# Altium PCB Lab11.PcbDoc
Units mil, origin at the board's own origin, x right, y up, seen from the top; angles counter-clockwise.
Board outline 4232.28 x 3051.18 mil, 2 copper layers (Top Layer, Top, Bottom Layer, Bottom); 13 components, 9 nets, 27 pads, 0 vias.
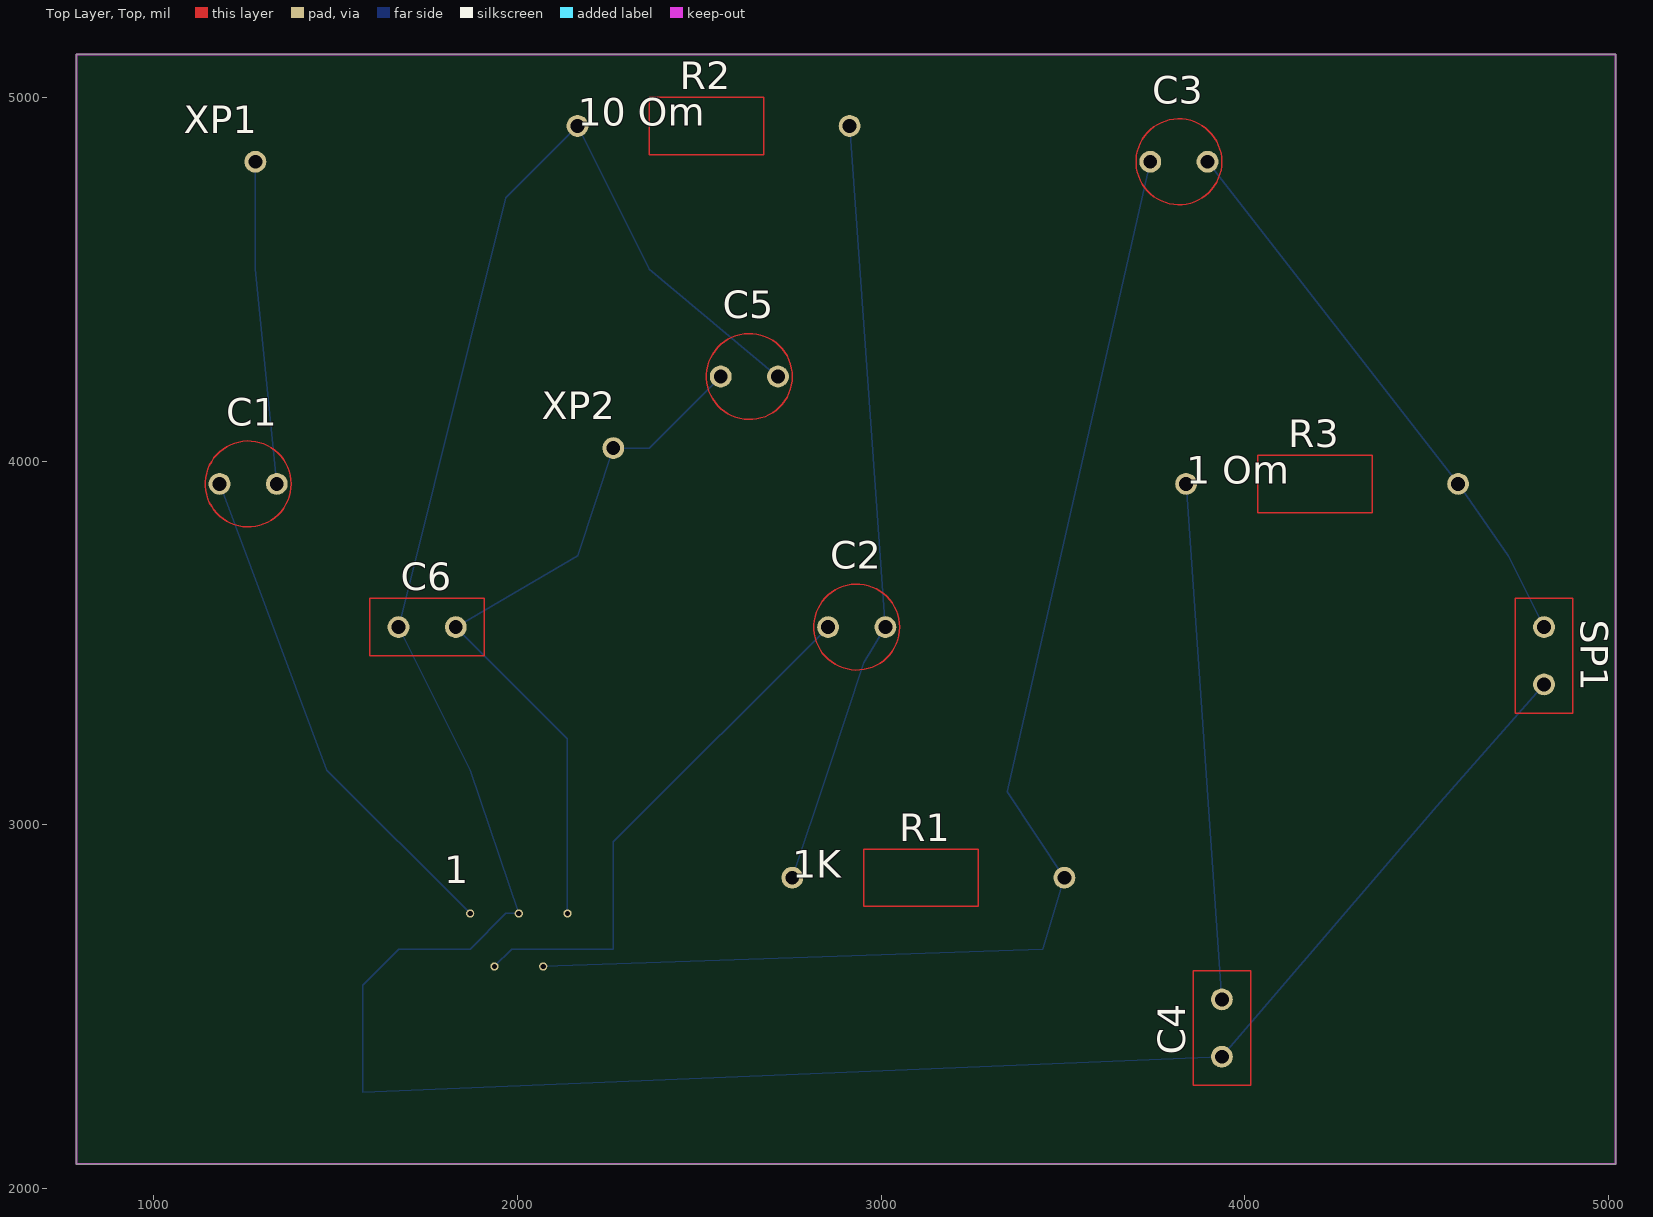
[diagram p0: Top Layer, Top view]
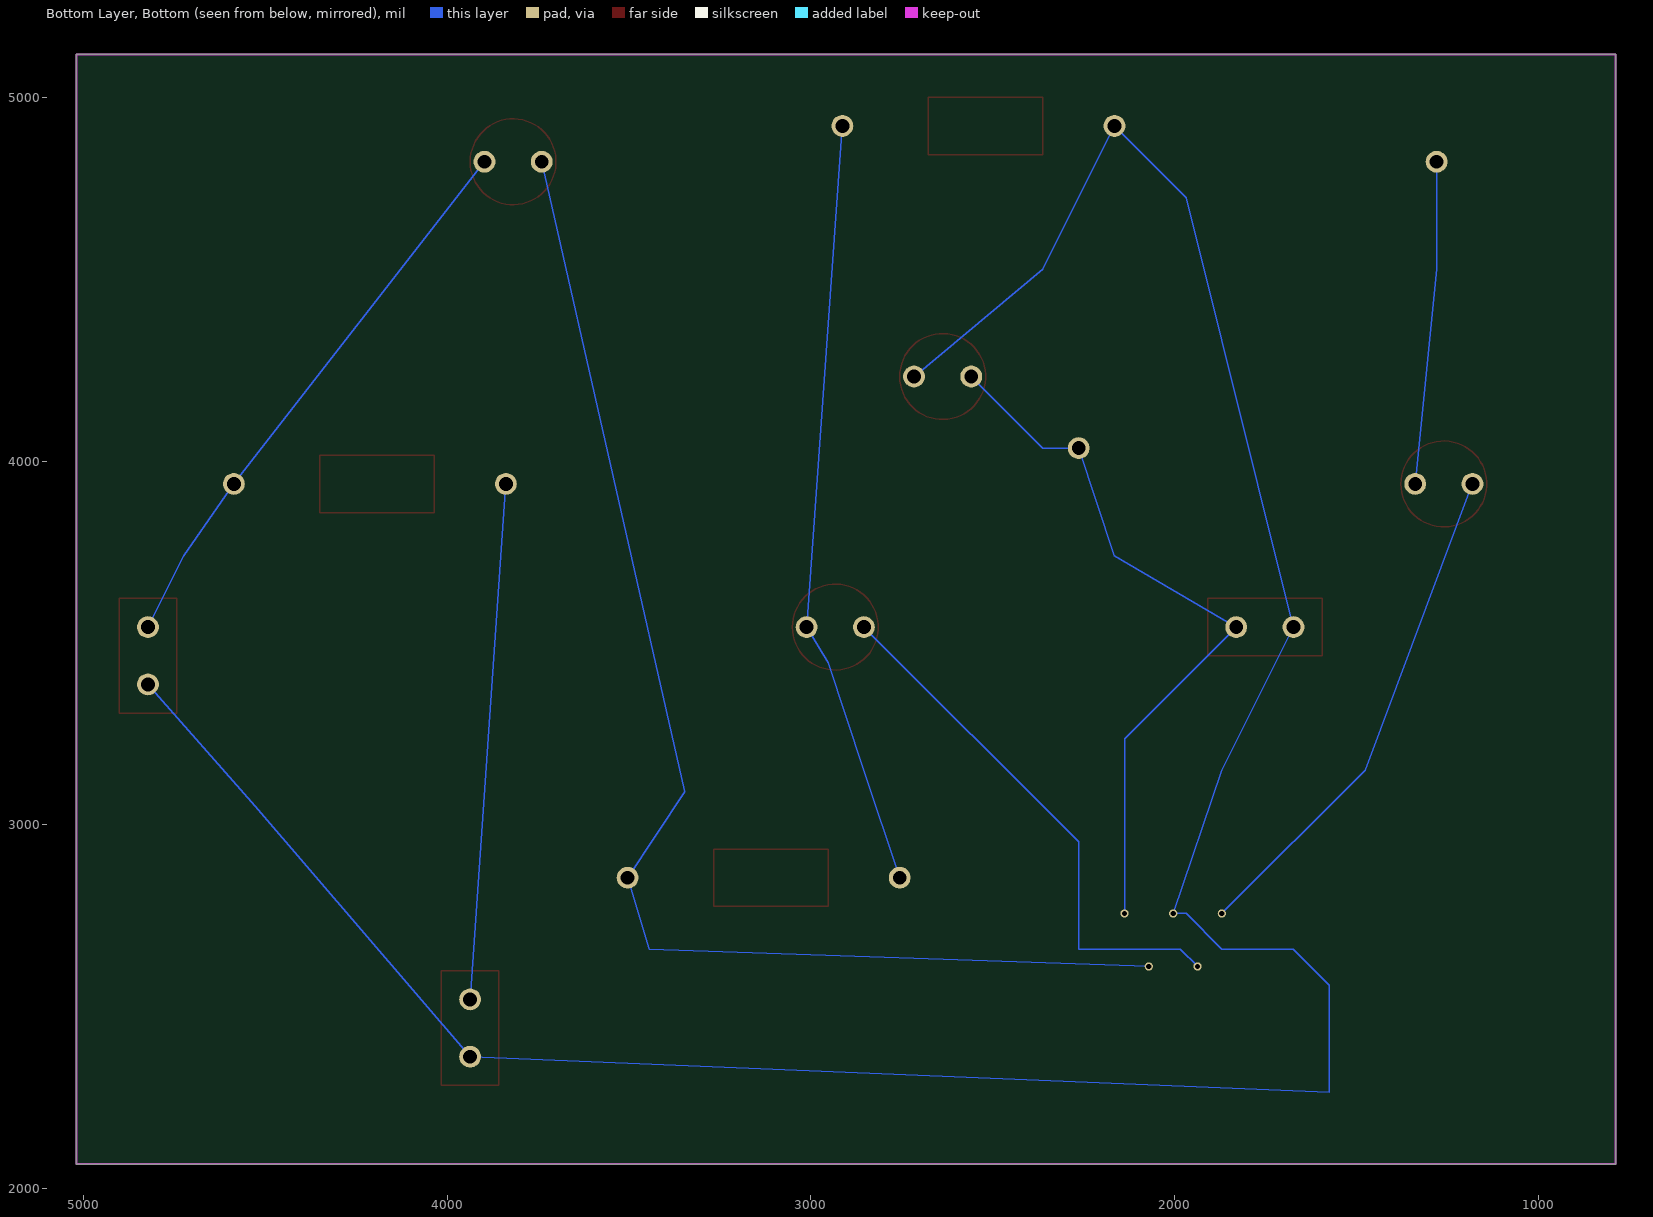
[diagram p1: Bottom Layer, Bottom view, seen from below]

## Layer stack, top to bottom
Top Solder, Top Mask: solder mask 0.4, Solder Resist, Dk 3.5
Top Layer, Top: signal copper 1.4
Dielectric 1: dielectric 12.6, FR-4, Dk 4.8
Bottom Layer, Bottom: signal copper 1.4
Bottom Solder, Bot Mask: solder mask 0.4, Solder Resist, Dk 3.5

## Board outline
5019.69,2066.93 5019.69,5118.11 787.4,5118.11 787.4,2066.93 885.83,2066.93

## Design rules (kind name [scope] priority, off if disabled: settings)
Clearance [All] p1: gap=10 ignorepadtopadclearanceinfootprint=FALSE except(0: Arc-Hole Track-Hole SMDPad-Hole THPad-Hole Via-Hole Fill-Hole Poly-Hole Region-Hole Text-Hole; 12: Arc-Arc Arc-Track Arc-THPad Arc-Via Track-Track Track-THPad Track-Via THPad-THPad THPad-Via Via-Via)
PlaneClearance [All] p1: clearance=10
PolygonConnect [All] p1: connectstyle=Relief reliefconductorwidth=10 reliefentries=4 polygonreliefangle="90 Angle" airgapwidth=10
RoomDefinition [All] p1: confinementstyle=ConfineIn formatcopy=TRUE lockcomponents=FALSE outline 590.55,1870.08 5216.54,1870.08 5216.54,5314.96 590.55,5314.96
RoutingVias [All] p1: holewidth=28 width=50 viastyle="Through Hole" minholewidth=28 minwidth=50 maxholewidth=28 maxwidth=50
SolderMaskExpansion [All] p1: expansion=4 istentingtop=FALSE
Width [All] p1: maxlimit=10 minlimit=10 preferedwidth=10
29 further rules are at their usual default settings.

## Components (designator, comment, footprint, x,y, rotation, side; value= is the part's Value field where it differs from the comment)
1 "" TDA2003 1870.08,2755.91 r0 top
C1 "10mF 16V" CAP2 1181.1,3937.01 r0 top
C2 "100mF 16V" CAP2 2854.33,3543.31 r0 top
C3 "470mF 16V" CAP2 3740.16,4822.83 r0 top
C4 "0.1mF" CAP1 3937.01,2362.2 r90 top
C5 "100mF 16V" CAP2 2559.06,4232.28 r0 top
C6 "0.1mF" CAP1 1673.23,3543.31 r0 top
R1 "1K" RES 2755.91,2854.33 r0 top
R2 "10 Om" RES 2165.35,4921.26 r0 top
R3 "1 Om" RES 3838.58,3937.01 r0 top
SP1 "" CAP1 4822.83,3543.31 r270 top
XP1 "IN" 1PAD 1279.53,4822.83 r0 top
XP2 "+12V" 1PAD 2263.78,4035.43 r0 top

## Footprints (in the part's own frame and the unit in brackets; to place one, negate y for a bottom-side part, rotate by r counter-clockwise, add the part's x,y. Pads: shape width x height; smd on the part's side, far side on the other; paste and mask are expansions set on the pad)
1PAD [mil]
  round 60 hole 38: 1(0,0)
CAP1 [mil]
  round 60 hole 38: 1(0,0) 2(157.48,0)
  Top Layer, Top lines w3.94: -78.74,78.74 236.22,78.74 236.22,-78.74 -78.74,-78.74 -78.74,78.74
CAP2 [mil]
  round 60 hole 38: 1(0,0) 2(157.48,0)
  Top Layer, Top circle w3.94: c78.74,0 r118.11
RES [mil]
  round 60 hole 38: 1(0,0) 2(748.03,0)
  Top Layer, Top lines w3.94: 196.85,-78.74 511.81,-78.74 511.81,78.74 196.85,78.74 196.85,-78.74
TDA2003 [mm]
  round 0.58 hole 0.38: 1(0,0) 2(1.7,-3.7) 3(3.4,0) 4(5.1,-3.7) 5(6.8,0)

## Nets (pads, with @x,y where several pads share a name; then routed paths per layer and width w, separated by ;. In a path a pad name is that pad's centre, name@x,y a point inside that pad or via, vN(x,y) a via of type N, cw(c..) or ccw(c..) an arc to the next point about the centre after c; other vN are vias at no path point)
1: 1.3 C4.1 C5.2 C6.1 R2.1 SP1.2 | length 7777.2
  Bottom Layer, Bottom w3.94: C5.2 2362.2,4527.56 R2.1 1968.5,4724.41 C6.1 1870.08,3149.61 1.3 1968.5,2755.91 1870.08,2657.48 1673.23,2657.48 1574.8,2559.06 1574.8,2263.78 C4.1 4527.56,3051.18 SP1.2
NET00000: C2.2 R1.1 R2.2 | length 2118.7
  Bottom Layer, Bottom w3.94: R1.1 2854.33,3149.61 2952.76,3444.88 C2.2 R2.2
NET00001: 1.4 C3.1 R1.2 | length 3640.7
  Bottom Layer, Bottom w3.94: 1.4 3444.88,2657.48 R1.2 3346.46,3090.55 C3.1
NET00002: C3.2 R3.2 SP1.1 | length 1582.6
  Bottom Layer, Bottom w3.94: C3.2 R3.2 4724.41,3740.16 SP1.1
NET00003: C4.2 R3.1 | length 1420.7
  Bottom Layer, Bottom w3.94: R3.1 C4.2
NET00004: 1.2 C2.1 | length 1476.8
  Bottom Layer, Bottom w3.94: 1.2 1984.25,2657.48 2263.78,2657.48 2263.78,2952.76 C2.1
NET00005: 1.1 C1.1 | length 1397.7
  Bottom Layer, Bottom w3.94: C1.1 1476.38,3149.61 1.1
NET00007: C1.2 XP1.1 | length 888.8
  Bottom Layer, Bottom w3.94: XP1.1 1279.53,4527.56 C1.2
NET00008: 1.5 C5.1 C6.2 XP2.1 | length 1990.9
  Bottom Layer, Bottom w3.94: 1.5 2137.8,3236.22 C6.2 2165.35,3740.16 XP2.1 2362.2,4035.43 C5.1

## Keep-outs
Keep-Out Layer, Board:
  the board outline again, w5